# Altium PCB PCB_Layout.PcbDoc.PcbDoc
Units mil, origin at the board's own origin, x right, y up, seen from the top; angles counter-clockwise.
Board outline 2355 x 2925 mil, 2 copper layers (Top Layer, Bottom Layer); 9 components, 12 nets, 32 pads, 0 vias.
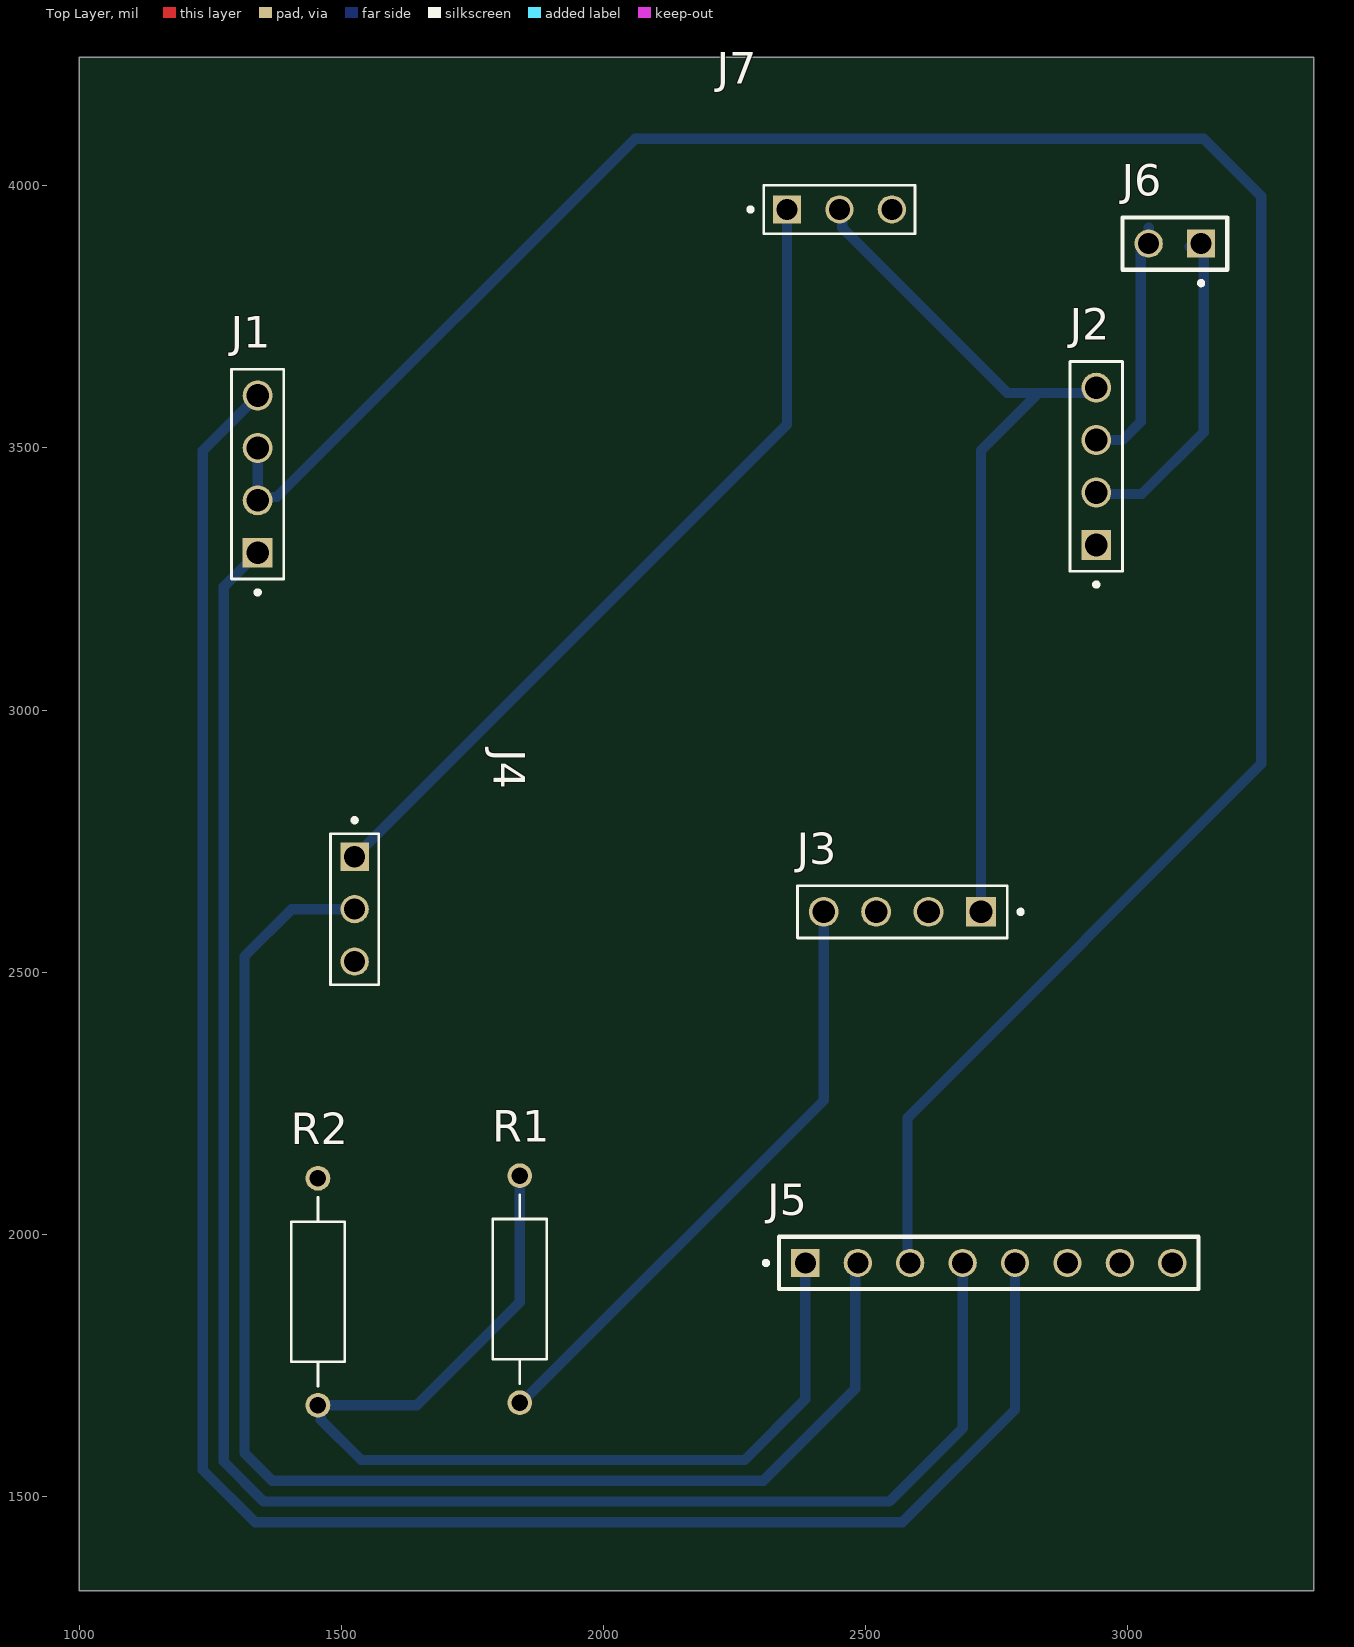
[diagram p0: Top Layer view]
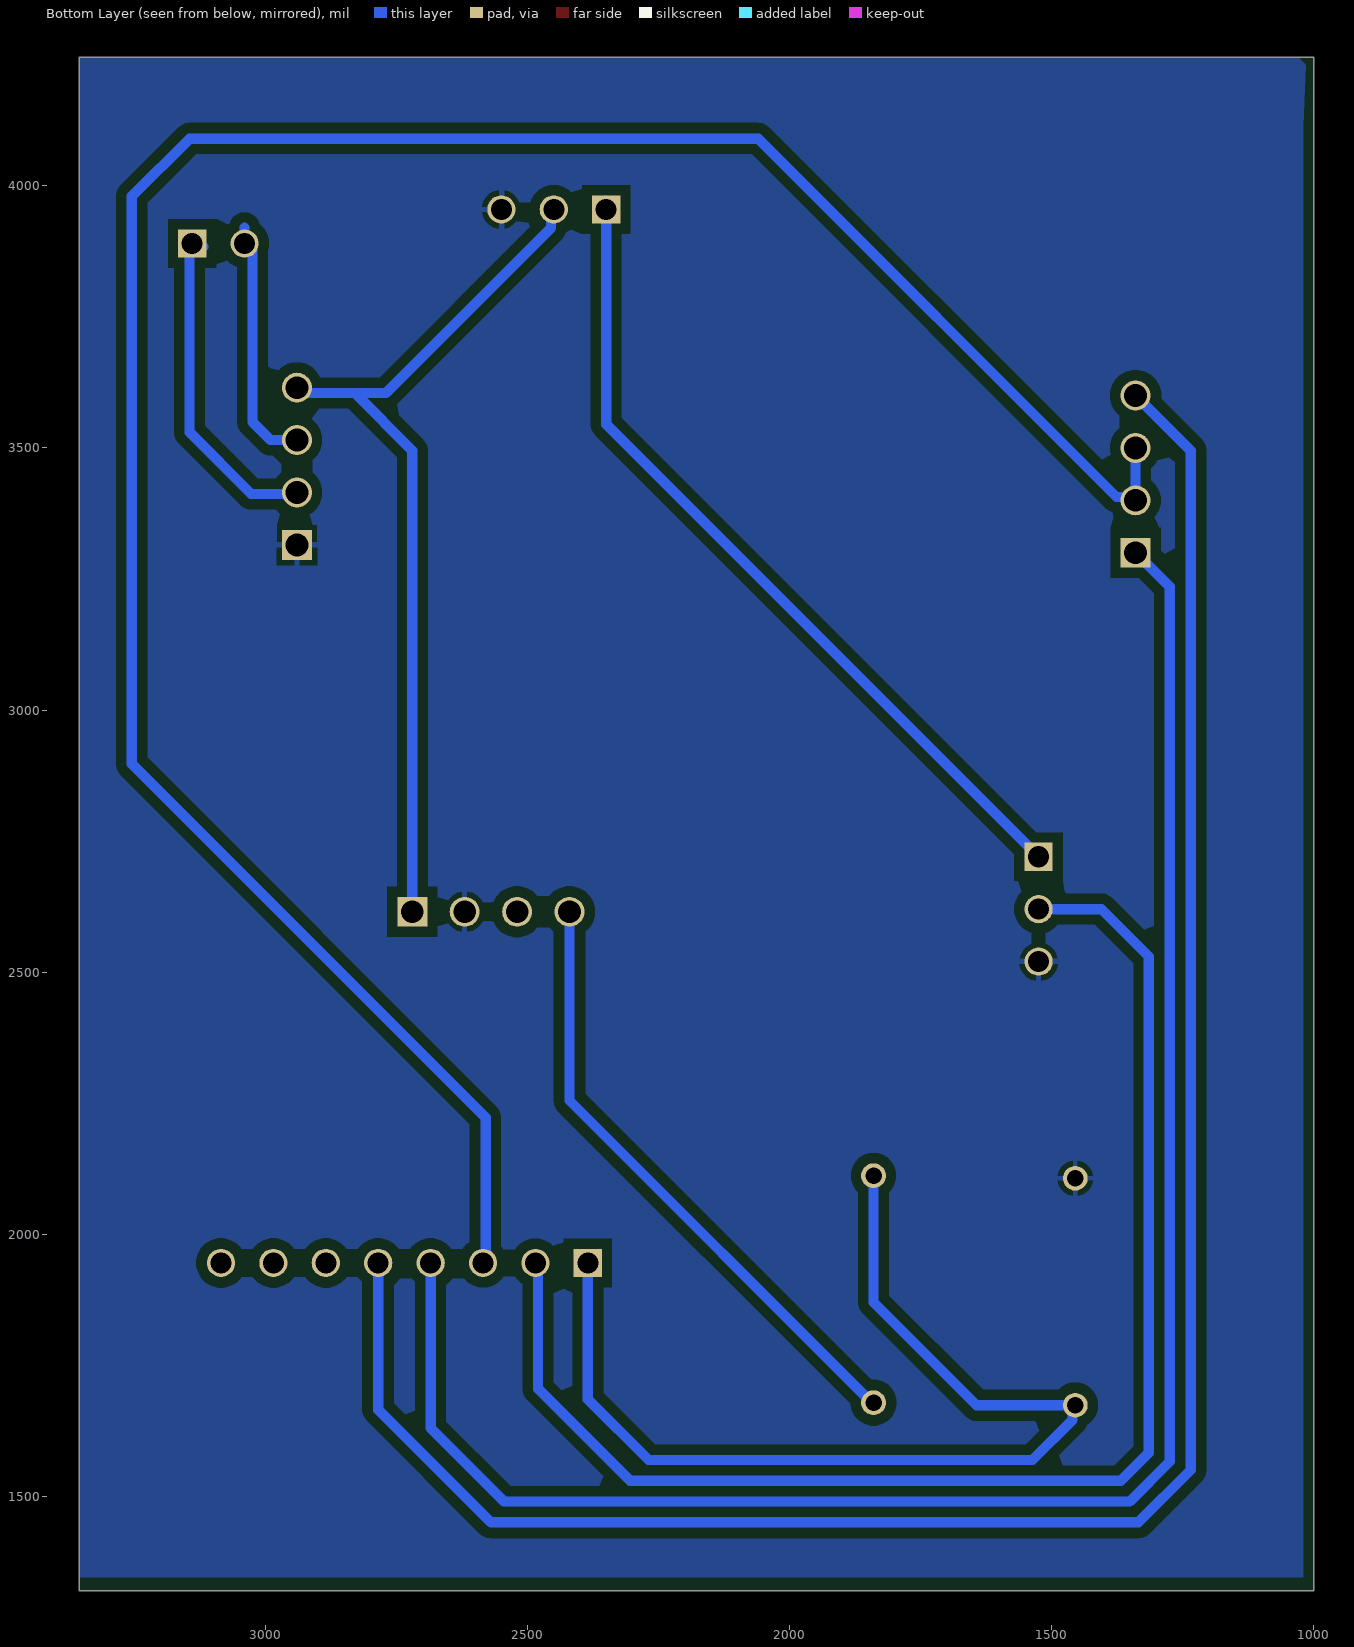
[diagram p1: Bottom Layer view, seen from below]
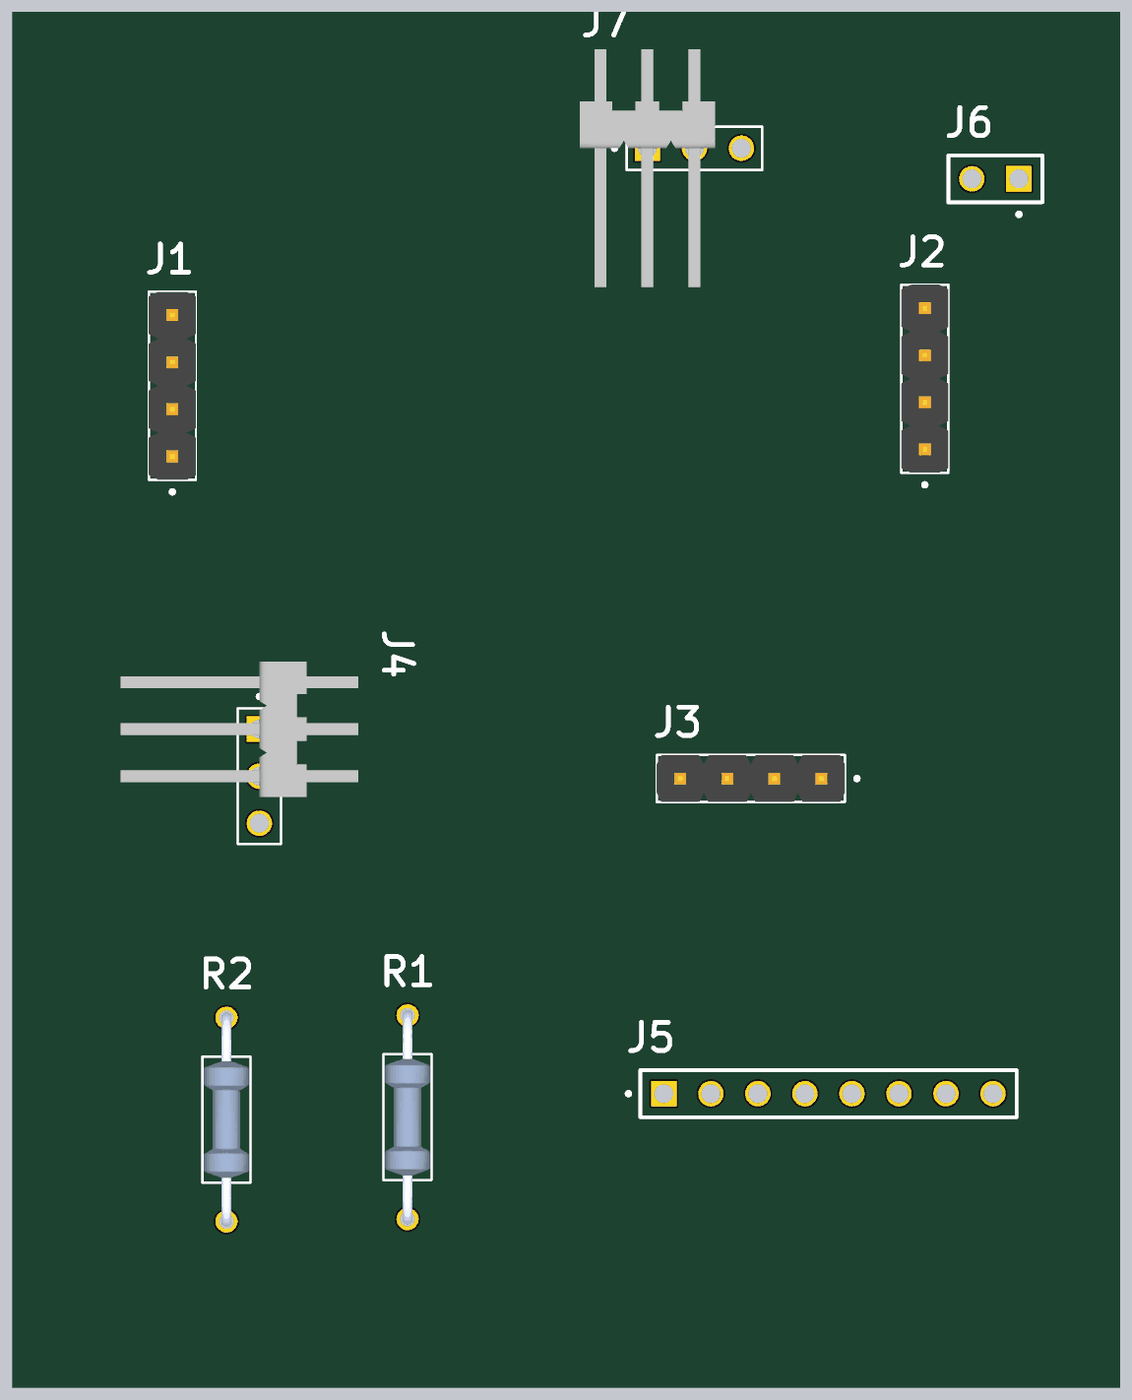
[diagram p2: 3D render of the assembled board from above, using the file's embedded part models]

## Layer stack, top to bottom
Top Solder: solder mask 0.4, Solder Resist, Dk 3.5
Top Layer: signal copper 1.4
Dielectric 1: dielectric 12.6, FR-4, Dk 4.8
Bottom Layer: signal copper 1.4
Bottom Solder: solder mask 0.4, Solder Resist, Dk 3.5

## Board outline
1000,1320 3355,1320 3355,4245 1000,4245

## Design rules (kind name [scope] priority, off if disabled: settings)
Clearance [All] p1: gap=20 ignorepadtopadclearanceinfootprint=FALSE
PolygonConnect [All] p1: connectstyle=Relief reliefconductorwidth=10 reliefentries=4 polygonreliefangle="90 Angle" airgapwidth=10
RoutingVias [All] p1: holewidth=28 width=50 viastyle="Through Hole" minholewidth=28 minwidth=50 maxholewidth=28 maxwidth=50
SolderMaskExpansion [All] p1: expansion=4 istentingtop=FALSE
SupplyNets "Schematic Supply Nets_2" [InNet('+5')] p1: voltage=0.000
SupplyNets "Schematic Supply Nets_1" [InNet('VCC')] p2: voltage=0.000
SupplyNets "Schematic Supply Nets" [InNet('GND')] p3: voltage=0.000
Width [All] p1: maxlimit=19.68 minlimit=19.68 preferedwidth=19.68 minimp=50.000000 maximp=50.000000 favimp=50.000000
30 further rules are at their usual default settings.

## Components (designator, comment, footprint, x,y, rotation, side; value= is the part's Value field where it differs from the comment)
J1 "MAX485" WURTH_61300411121 1340,3450 r90 top
J2 "MAX485" WURTH_61300411121 2940,3465 r90 top
J3 "MQ_gas" WURTH_61300411121 2570,2615 r180 top
J4 "DHT11" TE_644884-3 1525,2720 r270 top
J5 "OUTPUT" SAMTEC_TSW-108-X-X-S 2735,1945 r180 top
J6 "OUTPUT" SAMTEC_MTSW-101-08-S-D-318 3140,3890 r90 top
J7 "DHT11" TE_644884-3 2350,3955 r0 top
R1 "10k" RESAD1100W55L680D260 1840,1895 r90 top
R2 "10k" RESAD1100W55L680D260 1455,1890 r90 top

## Footprints (in the part's own frame and the unit in brackets; to place one, negate y for a bottom-side part, rotate by r counter-clockwise, add the part's x,y. Pads: shape width x height; smd on the part's side, far side on the other; paste and mask are expansions set on the pad)
RESAD1100W55L680D260 [mm]
  round 1.2 hole 0.8: 1(-5.5,0) 2(5.5,0)
  silkscreen extent -4.58,-1.3 4.58,1.3, body extent -5.77,-1.2 5.77,1.2, height 2.4
SAMTEC_MTSW-101-08-S-D-318 [mm]
  rect 1.37x1.37 hole 1.02: 01(0,0)
  round 1.37 hole 1.02: 02(0,2.54)
  silkscreen extent -2.02,-1.27 1.27,3.81
SAMTEC_TSW-108-X-X-S [mm]
  rect 1.37x1.37 / inner round 1.37 / far side rect 1.37x1.37 hole 1.02: 01(8.89,0)
  round 1.37 hole 1.02: 02(6.35,0) 03(3.81,0) 04(1.27,0) 05(-1.27,0) 06(-3.81,0) 07(-6.35,0) 08(-8.89,0)
  silkscreen extent -10.16,-1.27 10.9,1.27
TE_644884-3 [mm]
  rect 1.37x1.37 / inner round 1.37 / far side rect 1.37x1.37 hole 1.02 mask+0.102: 1(0,0)
  round 1.37 hole 1.02 mask+0.102: 2(2.54,0) 3(5.08,0)
  silkscreen extent -1.87,-1.17 6.2,1.17, body extent -3.66,-7.49 3.66,5.33, height 1.17
WURTH_61300411121 [mm]
  rect 1.45x1.45 / inner round 1.45 / far side rect 1.45x1.45 hole 1.1: 01(-3.81,0)
  round 1.45 hole 1.1: 02(-1.27,0) 03(1.27,0) 04(3.81,0)
  silkscreen extent -5.83,-1.27 5.08,1.27, body extent -5.08,-1.27 5.08,1.27, height 7.27

## Part data
J1 J2 J3: library part 61300411121, "Connector Header Through Hole 4 position 0.100 (2.54mm)", Package=None, Check_prices=https://www.snapeda.com/parts/61300411121/W%25C3%25BCrth+Elektronik+Midcom/view-part/?ref=eda, MF="WÃ¼rth Elektronik", MP=61300411121, SnapEDA_Link=https://www.snapeda.com/parts/61300411121/W%25C3%25BCrth+Elektronik+Midcom/view-part/?ref=snap
J4 J7: library part 644884-3, "Conn Unshrouded Header HDR 3 POS 2.54mm Solder ST Thru-Hole Bag/Box", Package=None, Check_prices=https://www.snapeda.com/parts/644884-3/TE+Connectivity+AMP+Connectors/view-part/?ref=eda, EU_RoHS_Compliance=Compliant, MF="TE Connectivity", MP=644884-3, SnapEDA_Link=https://www.snapeda.com/parts/644884-3/TE+Connectivity+AMP+Connectors/view-part/?ref=snap
J5: library part TSW-108-X-X-S, "Connector Header Through Hole 8 position 0.100 (2.54mm)", Package=None, Check_prices=https://www.snapeda.com/parts/TSW-108-23-L-S/Samtec/view-part/?ref=eda, MF=Samtec, MP=TSW-108-23-L-S, SnapEDA_Link=https://www.snapeda.com/parts/TSW-108-23-L-S/Samtec/view-part/?ref=snap
J6: library part MTSW-101-08-S-D-318, Package=None, Availability=Unavailable, MP=MTSW-101-08-S-D-318, Price=None
R1 R2: library part MFR-25FBF52-1K, "1.07 kOhms Â±1% 0.25W, 1/4W Through Hole Resistor Axial - Metal Film", Package="RADIAL-2 YAGEO", Check_prices=https://www.snapeda.com/parts/MFR-25FBF52-1K/Yageo/view-part/?ref=eda, MF=Yageo, MP=MFR-25FBF52-1K, SnapEDA_Link=https://www.snapeda.com/parts/MFR-25FBF52-1K/Yageo/view-part/?ref=snap

## Nets (pads, with @x,y where several pads share a name; then routed paths per layer and width w, separated by ;. In a path a pad name is that pad's centre, name@x,y a point inside that pad or via, vN(x,y) a via of type N, cw(c..) or ccw(c..) an arc to the next point about the centre after c; other vN are vias at no path point)
+5: J2.04 J3.01 J7.2 | length 1683.1
  Bottom Layer w19.68: J7.2 2455.26,3949.74 2455.26,3919.74 2770,3605 2830,3605 ; J3.01 2720,3495 2830,3605 ; J2.04@2935,3605 2830,3605
A: J2.02 J6.01 | length 620.4
  Bottom Layer w19.68: J2.02@2942.16,3412.16 3027.16,3412.16 3145,3530 J6.01@3145,3890 ; J6.01@3118.47,3883.78 J6.01@3124.68,3890
A0: J3.04 R1.1 | length 1182.8
  Bottom Layer w19.68: R1.1@1838.19,1673.19 2420,2255 J3.04
A1: J4.2 J5.02 | length 2697
  Bottom Layer w19.68: J4.2 1405,2620 1314.68,2529.68 1314.68,1582.56 1367.88,1529.37 2304.37,1529.37 2480,1705 2480,1940 J5.02
B: J2.03 J6.02 | length 475.7
  Bottom Layer w19.68: J2.03 2990,3515 3025,3550 3025,3875 J6.02 3040,3920
D0: J3.03 | length 7.1
  Bottom Layer w19.68: J3.03@2515,2620 J3.03
DI: J1.01 J5.04 | length 3575.6
  Bottom Layer w19.68: J1.01 1275,3235 1275,1566.12 1351.44,1489.68 2544.68,1489.68 2685,1630 J5.04
GND: J2.01 J3.02 J4.3 J7.3 R2.2
PA0: J5.01 R1.2 R2.1 | length 2002.2
  Bottom Layer w19.68: R1.2 1840,1870 1643.46,1673.46 R2.1 1460.27,1668.19 1460.27,1645.98 1537.2,1569.06 2269.05,1569.06 2385,1685 J5.01
R0: J1.04 J5.05 | length 4054
  Bottom Layer w19.68: J1.04 1235,3495 1235,1550 1335,1450 2570,1450 2785,1665 J5.05
RE: J1.02 J1.03 J5.03 | length 4666
  Bottom Layer w19.68: J1.03 J1.02 1346.38,3406.38 1376.38,3406.38 2060,4090 3145,4090 3255,3980 3255,2897.13 2580,2222.13 2580,1945 J5.03
VCC: J4.1 J7.1 | length 1611.5
  Bottom Layer w19.68: J4.1@1512.5,2707.5 J4.1 2350,3545 J7.1 J7.1@2350,3972.13
pads on no net: J5.06 J5.07 J5.08

## Polygon pours and split planes (outlines as drawn)
GND on Bottom Layer "GND_L02_P000" (solid, pour order 0): 1015,4245 3355,4245 3355,1345 1020,1345 1020,4105 1010,4115 1020,4115